# Altium PCB ECB01-Kit-002.PcbDoc
Units mil, origin at the board's own origin, x right, y up, seen from the top; angles counter-clockwise.
Board outline 693.7 x 562.99 mil, 2 copper layers (Top Layer, Bottom Layer); 7 components, 7 nets, 34 pads, 25 vias.
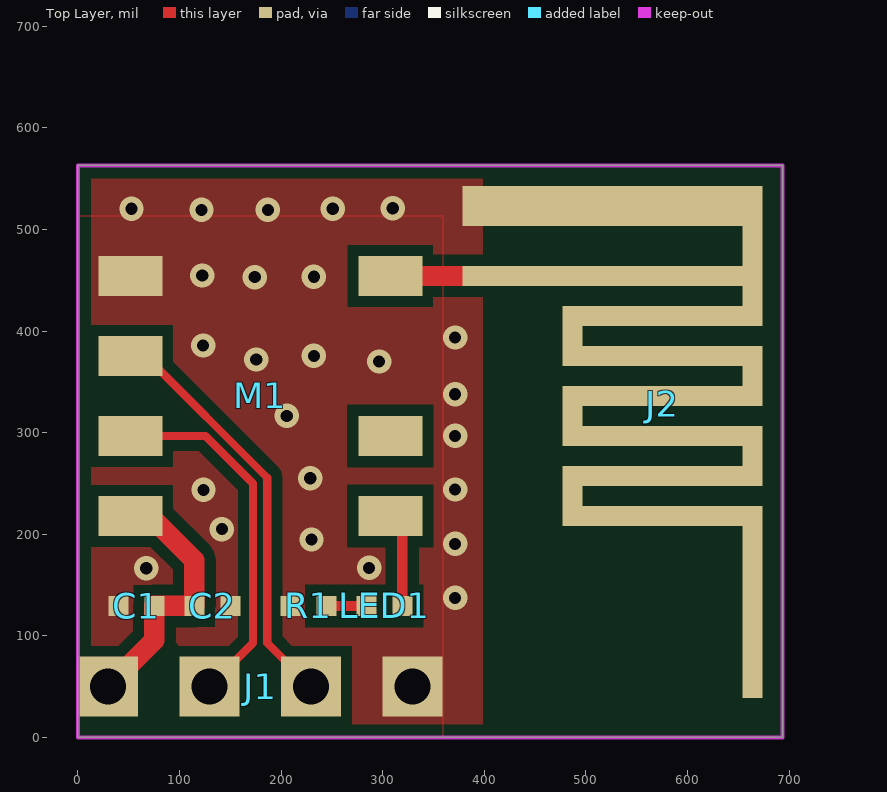
[diagram p0: Top Layer view]
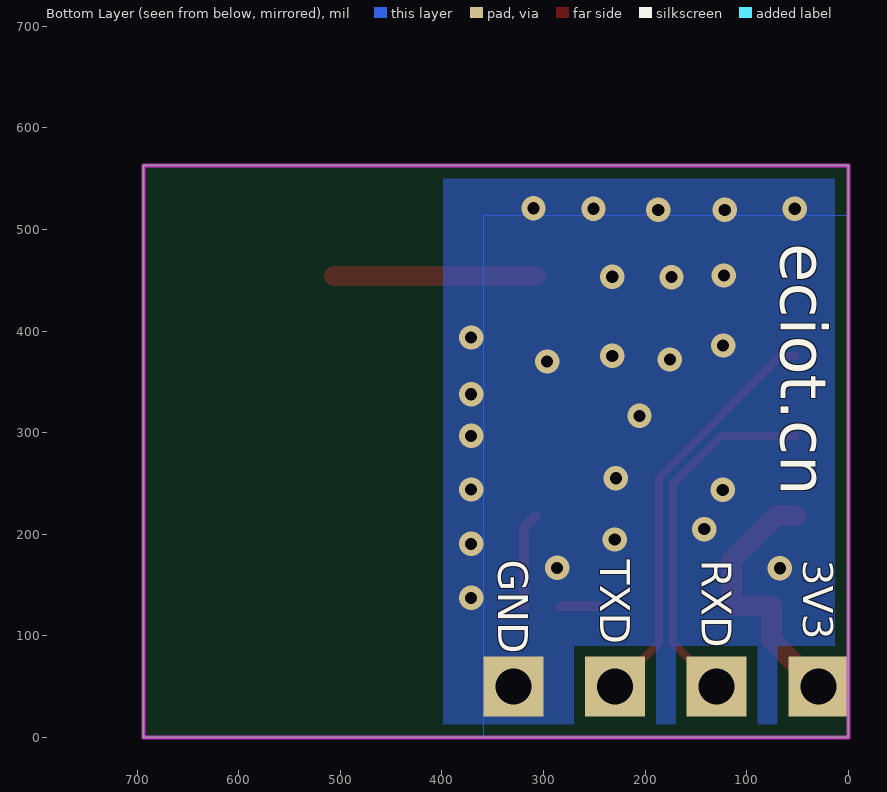
[diagram p1: Bottom Layer view, seen from below]

## Layer stack, top to bottom
Top Solder: solder mask 0.4, Solder Resist, Dk 3.5
Top Layer: signal copper 1.4
Dielectric 1: dielectric 12.6, FR-4, Dk 4.8
Bottom Layer: signal copper 1.4
Bottom Solder: solder mask 0.4, Solder Resist, Dk 3.5

## Board outline
0,0 0,562.99 693.7,562.99 693.7,0

## Design rules (kind name [scope] priority, off if disabled: settings)
Clearance [All] p1: gap=6 ignorepadtopadclearanceinfootprint=FALSE except(0: Arc-Hole Track-Hole SMDPad-Hole THPad-Hole Via-Hole Fill-Hole Poly-Hole Region-Hole Text-Hole)
PlaneConnect [All] p1: planeconnectstyle=Direct reliefexpansion=20 reliefentries=4 reliefconductorwidth=10 reliefairgap=10
PolygonConnect [All] p1: connectstyle=Direct reliefconductorwidth=10 reliefentries=4 polygonreliefangle="90 Angle" airgapwidth=10
RoutingVias [All] p1: holewidth=28 width=50 viastyle="Through Hole" minholewidth=28 minwidth=50 maxholewidth=28 maxwidth=50
SolderMaskExpansion [All] p1: expansion=4
Width [All] p1: maxlimit=100 minlimit=6 preferedwidth=10 minimp=50.000000 maximp=50.000000 favimp=50.000000
29 further rules are at their usual default settings.

## Classes and differential pairs
component class ECB01-Kit-V1.0: C1 C2 J1 LED1 M1 R1

## Components (designator, comment, footprint, x,y, rotation, side; value= is the part's Value field where it differs from the comment)
C1 "10uF" 0402 57.48,129.53 r0 top
C2 "100nF" 0402 132.28,129.53 r180 top
J1 "CON4" SIP04 179.53,50 r0 top
J2 "ANT" ANT-2.4G 525.98,523.23 r270 top
LED1 "0402 蓝" 0402-led 301.57,129.53 r180 top
M1 "ECB01" ECB01 327.17,513.39 r0 top
R1 "2.2kΩ" 0402 226.77,129.53 r180 top

## Footprints (in the part's own frame and the unit in brackets; to place one, negate y for a bottom-side part, rotate by r counter-clockwise, add the part's x,y. Pads: shape width x height; smd on the part's side, far side on the other; paste and mask are expansions set on the pad)
0402 [mm]
  rect 0.5x0.5 smd paste+0: 1(-0.45,0) 2(0.45,0)
0402-led [mm]
  rect 0.5x0.5 smd paste+0: 1(-0.45,0) 2(0.45,0)
ANT-2.4G [mm]
  rect 0.5x7.5 smd: 1(1.75,0)
  rect 1x7.5 smd: 2(0,0)
  rect 3.5x0.5 smd: 2(1.25,3.5)
  rect 0.5x5 smd: 2(2.75,1.25) 2(3.75,1.25) 2(4.75,1.25) 2(5.75,1.25) 2(6.75,1.25) 2(7.75,1.25)
  rect 1.5x0.5 smd: 2(3.25,-1) 2(4.25,3.5) 2(5.25,-1) 2(6.25,3.5) 2(7.25,-1)
  rect 4.8x0.5 smd: 2(9.9,3.5)
ECB01 [mm]
  rect 1.6x1 smd: 1(-7,-1.5) 2(-7,-3.5) 3(-7,-5.5) 4(-7,-7.5) 5(-0.5,-7.5) 6(-0.5,-5.5) 7(-0.5,-1.5)
SIP04 [mm]
  rect 1.5x1.5 hole 0.9: 1(-3.81,0) 2(-1.27,0) 3(1.27,0) 4(3.81,0)

## Part data
C1 C2: library part C, 封装=040, 类型=µ
LED1: library part LED-0402, 封装=040, 类型=LE
R1: library part R, 封装=040, 类型=µ

## Via types
v1: diameter 24, hole 12, Top Layer to Bottom Layer, tented both sides, 25 vias

## Nets (pads, with @x,y where several pads share a name; then routed paths per layer and width w, separated by ;. In a path a pad name is that pad's centre, name@x,y a point inside that pad or via, vN(x,y) a via of type N, cw(c..) or ccw(c..) an arc to the next point about the centre after c; other vN are vias at no path point)
+3.3V: C1.2 C2.2 J1.1 M1.4 | length 263.8
  Top Layer w20: J1.1 75.2,95.67 C1.2 C2.2 114.57,174.41 70.87,218.11 M1.4
GND: C1.1 C2.1 J1.4 J2.2@525.98,523.23 M1.1 R1.2
  other v1: 371.26,137.4 67.32,166.54 286.61,166.93 371.26,190.55 229.92,194.88 141.73,205.12 123.62,243.7 371.26,244.09 228.74,255.12 371.26,296.85 205.51,316.54 371.26,337.8 296.46,370.08 175.59,372.05 232.28,375.59 123.23,385.83 371.26,393.7 174.02,453.15 232.28,453.54 122.44,454.72 121.65,519.29 187.01,519.29 52.76,520.47 250.79,520.47 309.84,520.87
NetJ2_1: J2.1 M1.7 | length 198.8
  Top Layer w19.68: M1.7 J2.1@506.3,454.33
NetLED1_1: LED1.1 M1.5 | length 93.5
  Top Layer w10: M1.5 319.29,206.3 LED1.1
NetLED1_2: LED1.2 R1.1 | length 39.4
  Top Layer w10: R1.1 LED1.2
RXD: J1.2 M1.3 | length 358
  Top Layer w8: M1.3 125.48,296.85 172.44,249.89 172.44,92.91 J1.2
TXD: J1.3 M1.2 | length 408.1
  Top Layer w8: M1.2 66.54,375.59 186.44,255.69 186.44,93.09 J1.3
pads on no net: J2.2@486.61,237.8 J2.2@486.61,316.54 J2.2@486.61,395.28 J2.2@575.2,218.11 J2.2@575.2,257.48 J2.2@575.2,296.85 J2.2@575.2,336.22 J2.2@575.2,375.59 J2.2@575.2,414.96 J2.2@663.78,133.46 J2.2@663.78,277.17 J2.2@663.78,355.91 J2.2@663.78,474.02 M1.6

## Polygon pours and split planes (outlines as drawn)
GND on Bottom Layer (solid, remove dead copper, pour order 7): 0,0 0,562.99 398.43,562.99 398.43,0 0,0
GND on Bottom Layer "Bottom Layer-GND" (solid, remove dead copper, pour order 2): 0,0 0,513.39 359.06,513.39 359.06,0
GND on Top Layer (solid, remove dead copper, pour order 5): 0,562.99 398.43,562.99 398.43,0 0,0 0,562.99
no net on Top Layer (solid, pour order 4): 0,0
GND on Top Layer "Top Layer-GND" (solid, remove dead copper, pour order 0): 0,0 0,513.39 359.06,513.39 359.06,0

## Keep-outs
Keep-Out Layer:
  the board outline again, w3.94

## Silkscreen, mask and mechanical layers (free items; w line width, h text height)
Bottom Overlay:
  text "eciot.cn" at 81.5,486.22 h78.74 r90
  text "3V3" at 44.29,174.8 h29.53 r90
  text "RXD" at 144.29,174.8 h29.53 r90
  text "TXD" at 244.29,174.8 h29.53 r90
  text "GND" at 344.29,174.8 h29.53 r90
Mechanical 1:
  lines w10: 398.43,0 398.43,562.99

## Text inside footprints (layer, text, board x,y; h text height)
LED1: Mechanical 1 "+" at 327.95,133.46 h7.87 r180